# Altium PCB TIDA-01486E1_PCB.PcbDoc (part 2 of 3)
Units mil, origin at the board's own origin, x right, y up, seen from the top; angles counter-clockwise.
Board outline 4100 x 3000 mil, 4 copper layers (Top Layer, Signal Layer 1, Signal Layer 2, Bottom Layer), stack 61.6 mil thick; 140 components, 71 nets, 368 pads, 137 vias.
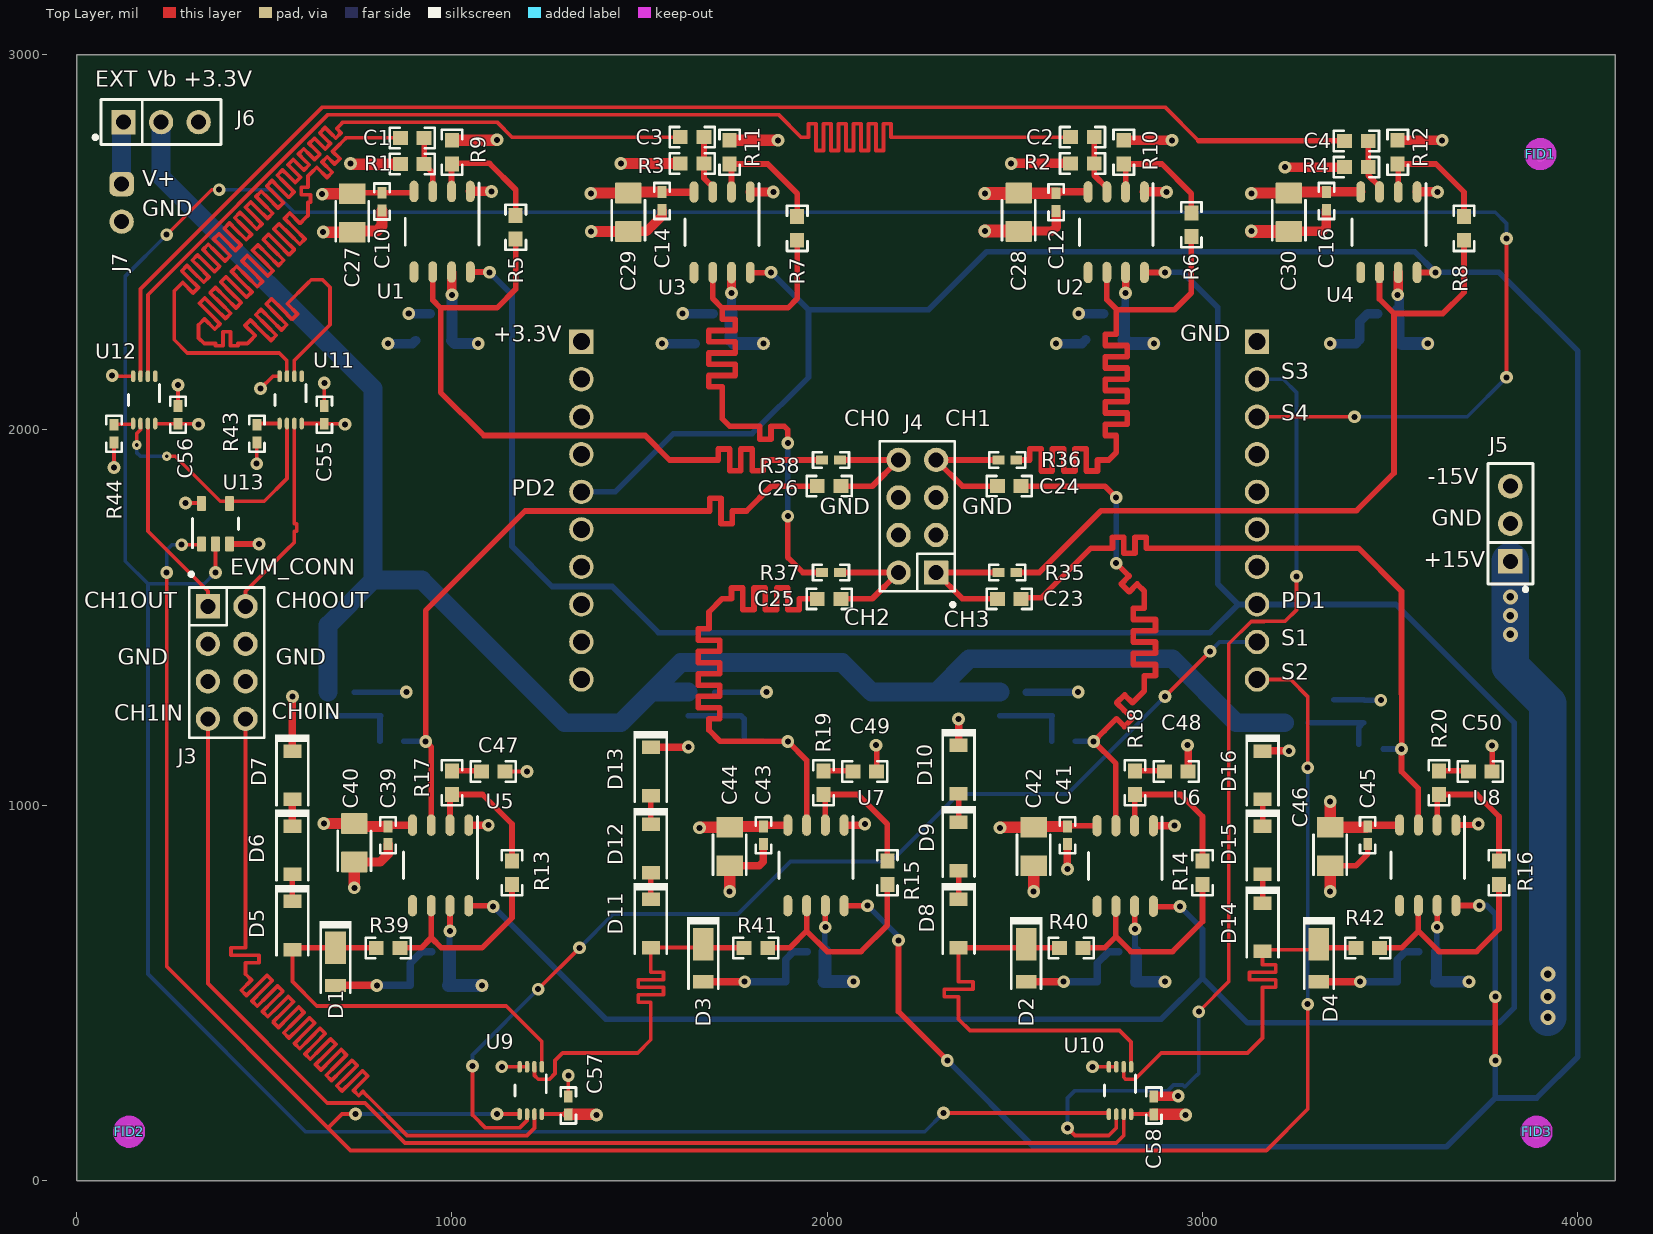
[diagram p0: Top Layer view]

## Via types
v1: diameter 34, hole 16, Top Layer to Bottom Layer, 129 vias
v2: diameter 40, hole 20, Top Layer to Bottom Layer, 6 vias
v3: diameter 26, hole 10, Top Layer to Bottom Layer, 2 vias

## Nets (pads, with @x,y where several pads share a name; then routed paths per layer and width w, separated by ;. In a path a pad name is that pad's centre, name@x,y a point inside that pad or via, vN(x,y) a via of type N, cw(c..) or ccw(c..) an arc to the next point about the centre after c; other vN are vias at no path point) (continued)
CH0_T: (continued)
  Top Layer w10: U11.2@580,2143 U11.2@580.16,2143.15 ; U11.2@580.16,2142.99 U11.2@580.16,2143.15 ; 585,2190 675,2280 675,2380 655,2400 625,2400 615,2390 561.07,2336.07 588.43,2308.7 574.29,2294.56 546.92,2321.92 519.56,2349.29 505.42,2335.15 532.78,2307.78 560.15,2280.42 546,2266.28 518.64,2293.64 491.28,2321 477.13,2306.86 504.5,2279.5 531.86,2252.13 517.72,2237.99 490.36,2265.36 462.99,2292.72 448.85,2278.58 476.21,2251.21 462.07,2237.07 455,2230 450,2230 430,2230 430,2224.17 410,2224.17 410,2230 410,2261.86 390,2261.86 390,2230 390,2224.17 370,2224.17 370,2230 350,2230 340,2230 325,2245 325,2280 326.62,2281.62 340.76,2295.76 368.13,2268.4 382.27,2282.54 354.9,2309.9 327.54,2337.27 341.68,2351.41 369.05,2324.05 396.41,2296.68 410.55,2310.82 383.19,2338.19 355.82,2365.55 369.97,2379.69 397.33,2352.33 424.69,2324.97 438.84,2339.11 411.47,2366.47 384.11,2393.84 398.25,2407.98 425.62,2380.62 452.98,2353.25 467.12,2367.39 439.76,2394.76 412.39,2422.12 426.54,2436.26 453.9,2408.9 481.26,2381.54 495.41,2395.68 468.04,2423.04 440.68,2450.41 454.82,2464.55 482.18,2437.18 509.55,2409.82 523.69,2423.96 496.33,2451.33 468.96,2478.69 483.1,2492.83 510.47,2465.47 537.83,2438.1 551.97,2452.25 524.61,2479.61 497.25,2506.97 511.39,2521.12 538.75,2493.75 566.12,2466.39 580.26,2480.53 552.89,2507.89 525.53,2535.26 539.67,2549.4 567.04,2522.04 594.4,2494.67 608.54,2508.81 581.18,2536.18 553.81,2563.54 567.96,2577.68 595.32,2550.32 609.46,2564.46 616.53,2571.53 616.53,2586.53 616.53,2606.53 623.23,2606.53 623.23,2626.53 616.53,2626.53 598.43,2626.53 598.43,2646.53 616.53,2646.53 616.53,2666.53 616.53,2676.53 625.58,2685.58 639.72,2699.72 667.08,2672.35 681.22,2686.5 653.86,2713.86 668,2728 687.47,2708.53 701.62,2722.67 682.14,2742.14 696.29,2756.29 710.43,2770.43 717.5,2777.5 718.15,2778.15 C1.2@862.86,2778.15 ; 585.08,2189.92 580.16,2185 U11.2@580.16,2143.15
CH1_IN: C24.2 R30.2 U6.3 | length 1834.7
  Top Layer w15: C24.2@2516.5,1850 2740,1850 v1(2770,1820) ; U6.3@2770,946.39 U6.3@2769.04,945.43 2769.04,1110.96 v1(2710,1170) 2737.5,1197.5 2770.75,1230.75 2791.69,1209.82 2812.9,1231.03 2791.97,1251.97 2771.03,1272.9 2792.24,1294.12 2813.18,1273.18 2834.39,1294.39 2845,1305 2845,1315 2845,1345 2874.61,1345 2874.61,1375 2845,1375 2815.39,1375 2815.39,1405 2845,1405 2874.61,1405 2874.61,1435 2845,1435 2815.39,1435 2815.39,1465 2845,1465 2874.61,1465 2874.61,1495 2845,1495 2815.39,1495 2815.39,1525 2845,1525 2845,1555 2845,1570 2825.53,1589.47 2804.6,1568.53 2783.38,1589.75 2804.32,1610.68 2783.11,1631.89 2772.5,1642.5 v1(2770,1645)
  Bottom Layer w15: R30.2@2661.5,1170 v1(2710,1170) ; v1(2770,1645) v1(2770,1820)
CH1_OUT: R6.2 R36.1 U2.6 | length 2015.3
  Top Layer w15: R36.1@2503.62,1920 2525,1920 2540,1920 2540,1949.43 2570,1949.43 2570,1920 2570,1890.57 2600,1890.57 2600,1920 2600,1949.43 2630,1949.43 2630,1920 2630,1890.57 2660,1890.57 2660,1920 2660,1949.43 2690,1949.43 2690,1920 2690,1890.57 2720,1890.57 2720,1920 2750,1920 2770,1940 2770,1955 2770,1985 2740.57,1985 2740.57,2015 2770,2015 2799.43,2015 2799.43,2045 2770,2045 2740.57,2045 2740.57,2075 2770,2075 2799.43,2075 2799.43,2105 2770,2105 2740.57,2105 2740.57,2135 2770,2135 2799.43,2135 2799.43,2165 2770,2165 2740.57,2165 2740.57,2195 2770,2195 2799.43,2195 2799.43,2225 2770,2225 2740.57,2225 2740.57,2255 2770,2255 2770,2290 2770,2320 ; U2.6@2745,2419.52 2745,2346.65 2771.65,2320 2925,2320 2970,2365 R6.2@2970,2515.31
CH1_R: D2.1 D8.2 R40.2 U10.1 | length 1162.8
  Top Layer w10: D8.2@2350,620.2 2350,540 2350,530 2388.22,530 2388.22,510 2350,510 2311.78,510 2311.78,490 2350,490 2350,470 2350,430 2380,400 2779.06,400 2809.53,369.53 U10.1@2809.53,302.99
  Top Layer w15: D8.2@2350,620.2 2530,620.2 2530.2,620 R40.2@2618.5,620
CH1_T: C2.2 U12.2 | length 3678.2
  Top Layer w10: U12.2@190.16,2143.31 190.16,2360.16 670,2840 1870,2840 1930,2780 1940,2780 1950,2780 1950,2815.43 1970,2815.43 1970,2780 1970,2744.57 1990,2744.57 1990,2780 1990,2815.43 2010,2815.43 2010,2780 2010,2744.57 2030,2744.57 2030,2780 2030,2815.43 2050,2815.43 2050,2780 2050,2744.57 2070,2744.57 2070,2780 2070,2815.43 2090,2815.43 2090,2780 2090,2744.57 2110,2744.57 2110,2780 2110,2815.43 2130,2815.43 2130,2780 2130,2744.57 2150,2744.57 2150,2780 2150,2815.43 2170,2815.43 2170,2780 2340,2780 C2.2@2648.5,2780
CH2_IN: C25.1 R31.2 U7.3 | length 1955.1
  Top Layer w15: U7.3@1945,946.97 1945,1120 v1(1895,1170) 1715,1170 1685,1200 1685,1230 1713.96,1230 1713.96,1260 1685,1260 1656.04,1260 1656.04,1290 1685,1290 1713.96,1290 1713.96,1320 1685,1320 1656.04,1320 1656.04,1350 1685,1350 1713.96,1350 1713.96,1380 1685,1380 1656.04,1380 1656.04,1410 1685,1410 1713.96,1410 1713.96,1440 1685,1440 1656.04,1440 1656.04,1470 1685,1470 1685,1500 1685,1515 1720,1550 1745,1550 1745,1578.96 1775,1578.96 1775,1550 1775,1521.04 1805,1521.04 1805,1550 1805,1578.96 1835,1578.96 1835,1550 1835,1521.04 1865,1521.04 1865,1550 1865,1578.96 1895,1578.96 1895,1550 1895,1521.04 1925,1521.04 1925,1550 1940,1550 C25.1@1973.5,1550
  Bottom Layer w15: R31.2@1834.45,1170 1841.5,1170 v1@1894.45,1170
CH2_OUT: R7.2 R37.2 U3.6 | length 1894.9
  Top Layer w15: U3.6@1695,2419.2 1695,2350 1720,2325 ; v1(1895,1770) 1895,1660 1935,1620 R37.2@1986.38,1620 ; v1(1895,1965) 1895,2000 1885,2010 1860,2010 1850,2010 1850,1974.67 1820,1974.67 1820,2010 1790,2010 1775,2010 1740,2010 1720,2030 1720,2115 1684.67,2115 1684.67,2145 1720,2145 1755.33,2145 1755.33,2175 1720,2175 1684.67,2175 1684.67,2205 1720,2205 1755.33,2205 1755.33,2235 1720,2235 1684.67,2235 1684.67,2265 1720,2265 1755.33,2265 1755.33,2295 1720,2295 1720,2310 1720,2325 ; R7.2@1920,2505 1920,2350 1895,2325 1720,2325
  Bottom Layer w15: v1(1895,1770) v1(1895,1965)
CH2_R: D3.1 D11.2 R41.2 U9.2 | length 1162.8
  Top Layer w10: U9.2@1219.84,302.99 1219.84,280.16 1230,270 1260,270 1275,285 1275,320 1295,340 1495,340 1530,375 1530,425 1530,475 1496.25,475 1496.25,495 1530,495 1563.75,495 1563.75,515 1530,515 1496.25,515 1496.25,535 1530,535 1563.75,535 1563.75,555 1530,555 1530,565 1530,621.26 D3.1@1666.26,621.26
  Top Layer w15: D3.1@1680.2,620 R41.2@1778.5,620
  Top Layer w20: D3.1@1672.6,627.6 D3.1@1680.2,620